# Altium PCB TamagotchiMainBoard.PcbDoc
Units mil, origin at the board's own origin, x right, y up, seen from the top; angles counter-clockwise.
Board outline 2729.06 x 2729.06 mil, 2 copper layers (Top Layer, Bottom Layer); 41 components, 29 nets, 237 pads, 26 vias.
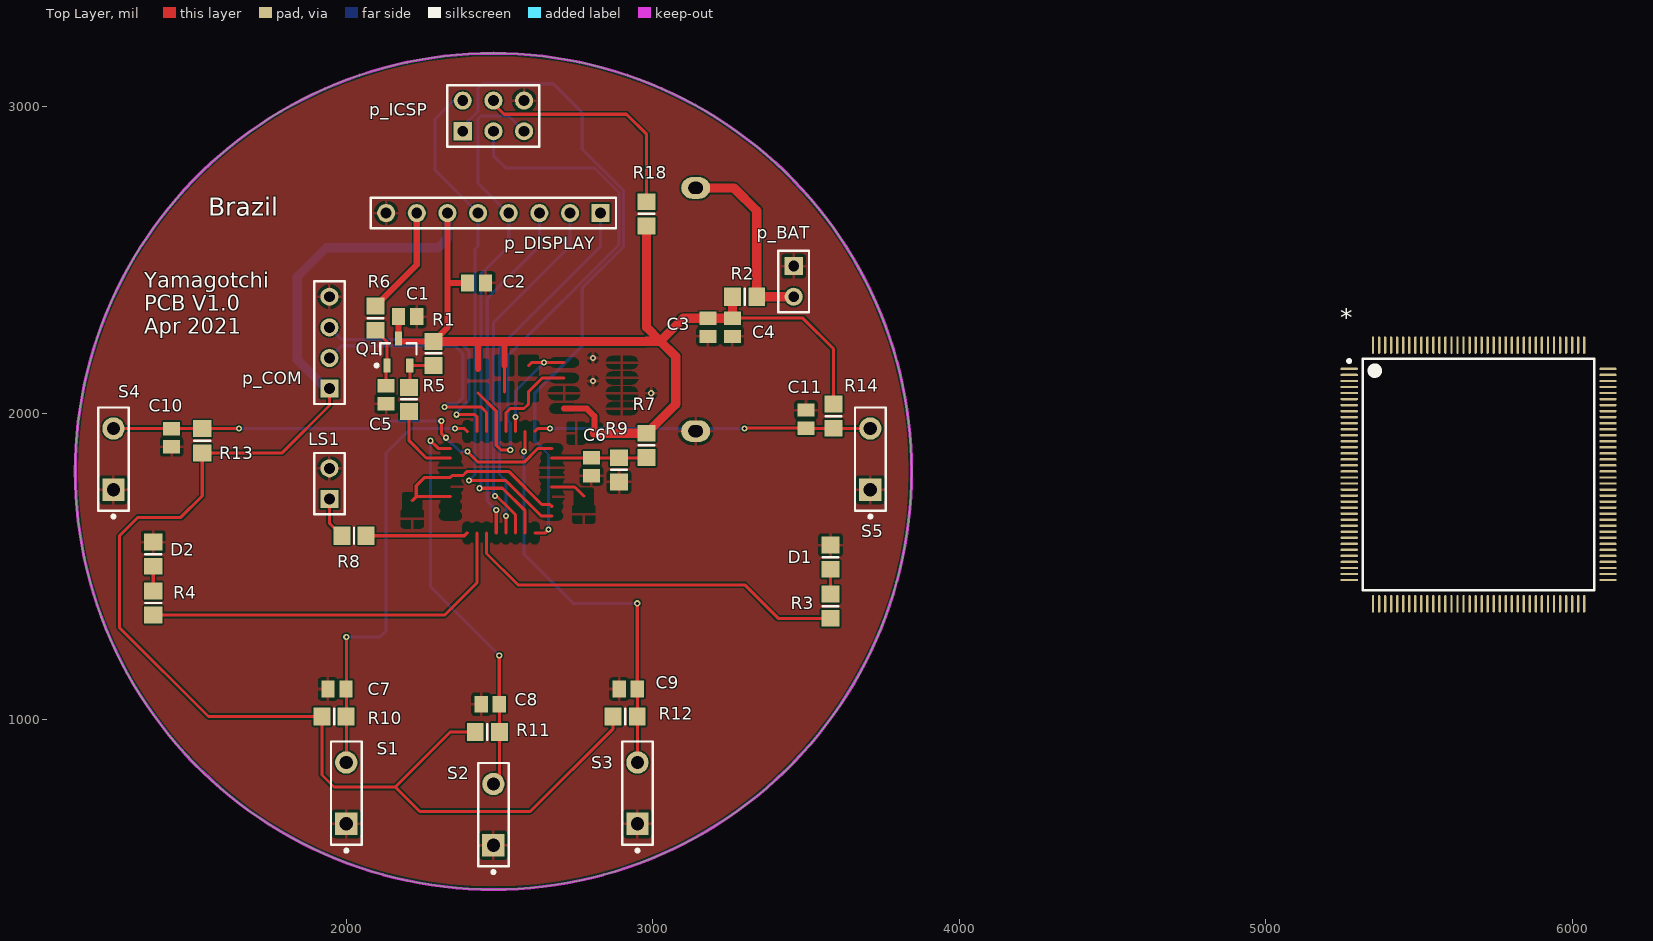
[diagram p0: Top Layer view]
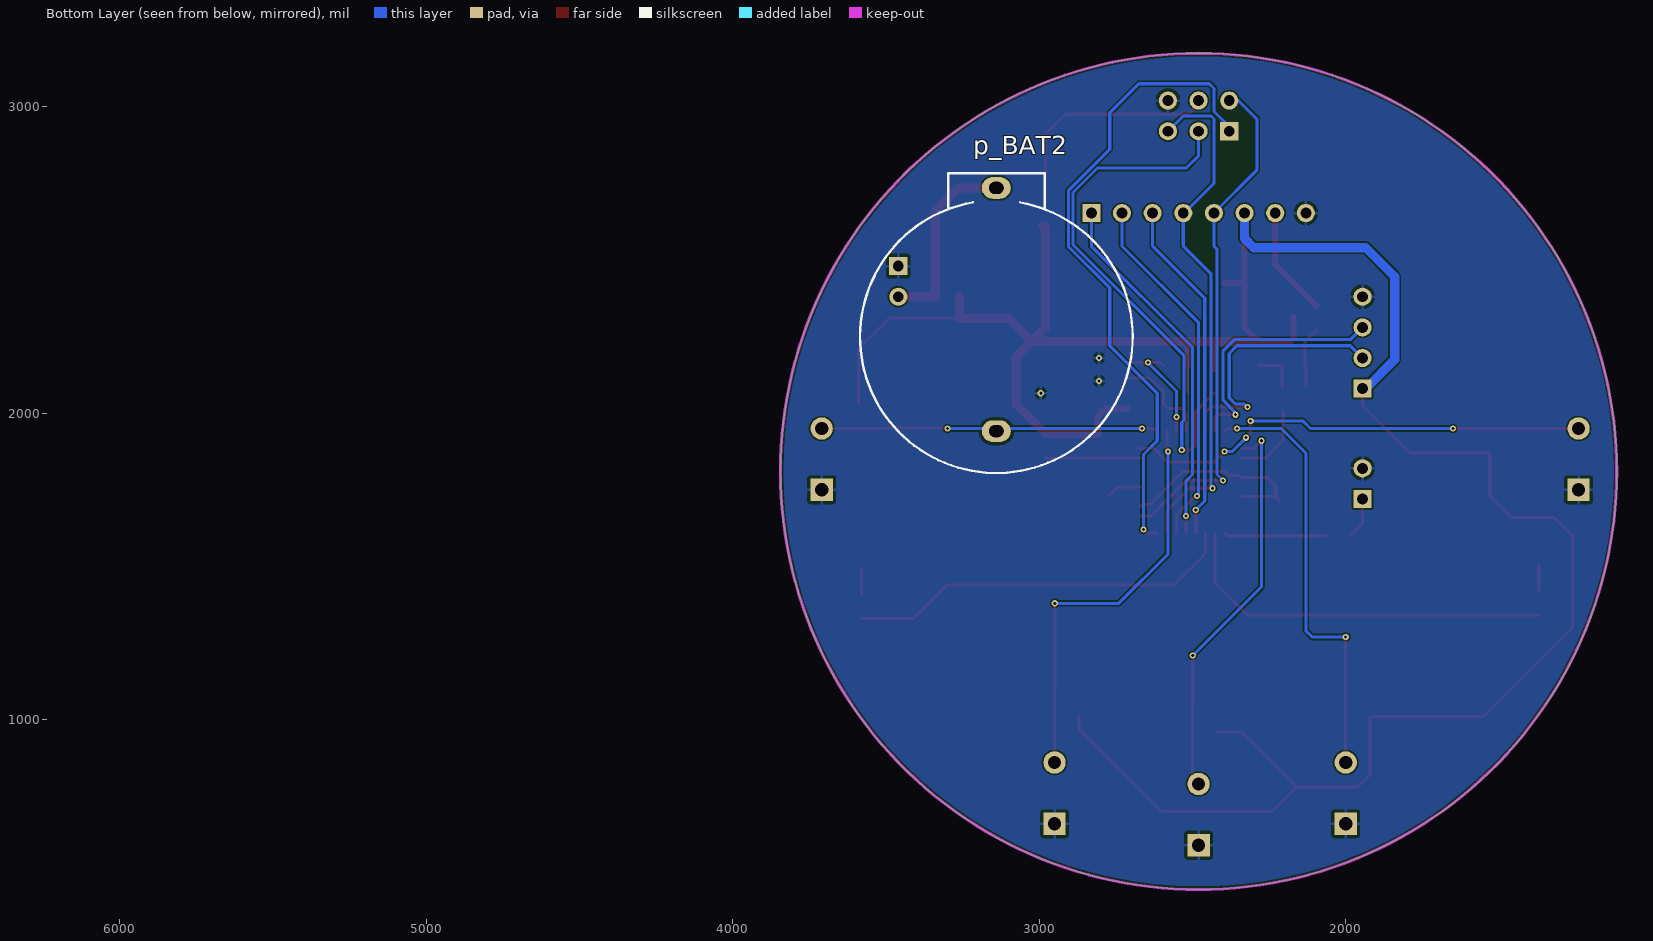
[diagram p1: Bottom Layer view, seen from below]

## Layer stack, top to bottom
Top Solder: solder mask 0.4, Solder Resist, Dk 3.5
Top Layer: signal copper 1.4
Dielectric 1: dielectric 12.6, FR-4, Dk 4.8
Bottom Layer: signal copper 1.4
Bottom Solder: solder mask 0.4, Solder Resist, Dk 3.5

## Board outline
1115.47,1810 ccw(c2480,1810) 2480,445.47 ccw(c2480,1810) 3844.53,1810 ccw(c2480,1810) 2480,3174.53 ccw(c2480,1810)

## Design rules (kind name [scope] priority, off if disabled: settings)
Clearance [All] p1: gap=5 ignorepadtopadclearanceinfootprint=FALSE except(0: Arc-Hole Track-Hole SMDPad-Hole THPad-Hole Via-Hole Fill-Hole Poly-Hole Region-Hole Text-Hole)
PolygonConnect [All] p1: connectstyle=Relief reliefconductorwidth=10 reliefentries=4 polygonreliefangle="90 Angle" airgapwidth=10
RoutingVias [All] p1: holewidth=28 width=50 viastyle="Through Hole" minholewidth=28 minwidth=50 maxholewidth=28 maxwidth=50
SolderMaskExpansion [All] p1: expansion=4
Width [All] p1: maxlimit=30 minlimit=10 preferedwidth=10 minimp=50.000000 maximp=50.000000 favimp=50.000000
30 further rules are at their usual default settings.

## Components (designator, comment, footprint, x,y, rotation, side; value= is the part's Value field where it differs from the comment)
* "R7F0E015D2CFB#AA1" SQFP50P2200X2200X170-144N 5695,1800 r0 top
C1 "Cap" C0805 2200,2315 r180 top value=1nF
C2 "Cap" C0805 2425,2425 r180 top value=10nF
C3 "Cap" C0805 3180,2280 r90 top value=1nF
C4 "Cap" C0805 3260,2280 r90 top value=100nF
C5 "Cap" C0805 2130,2060 r90 top value=1nF
C6 "Cap" C0805 2800,1825 r270 top value=0.1nF
C7 "Cap" C0805 1969.53,1100 r180 top value=0.1nF
C8 "Cap" C0805 2469.53,1050 r180 top value=0.1nF
C9 "Cap" C0805 2920,1100 r180 top value=0.1nF
C10 "Cap" C0805 1430,1920 r270 top value=0.1nF
C11 "Cap" C0805 3500,1980.47 r90 top value=0.1nF
D1 "LED0" 6-0805_M 3580,1530 r90 top
D2 "LED0" 6-0805_M 1370,1540 r90 top
LS1 "Buzzer" HDR1X2 1945,1720 r90 top
p_BAT "Header 2" HDR1X2 3460,2480 r270 top
p_BAT2 "" BTH2032 3140,2247.6 r270 bottom
p_COM "Header 4" HDR1X4 1945,2080 r90 top
p_DISPLAY "Nokia 5110 Display" HDR1X8 2830,2653 r180 top
p_ICSP "FTDI" HDR2X3 2380,2920 r0 top
Q1 "PNP" SOT-23B_N 2170,2200 r90 top
R1 "Res1" 6-0805_M 2285,2195 r270 top value=100k
R2 "Res1" 6-0805_M 3300,2380 r0 top value=0.1R
R3 "Res1" 6-0805_M 3580,1370 r90 top value=10k
R4 "Res1" 6-0805_M 1370,1380.63 r90 top value=10k
R5 "Res1" 6-0805_M 2205,2045 r270 top value=10k
R6 "Res1" 6-0805_M 2095,2310 r270 top value=300R
R7 "Res1" 6-0805_M 2980,1895 r90 top value=120k
R8 "Res1" 6-0805_M 2025,1600 r180 top value=10R
R9 "Res1" 6-0805_M 2890,1815 r270 top value=33k
R10 "Res1" 6-0805_M 1960,1010 r0 top value=100k
R11 "Res1" 6-0805_M 2460,960 r0 top value=100k
R12 "Res1" 6-0805_M 2910,1010 r0 top value=100k
R13 "Res1" 6-0805_M 1530,1910 r90 top value=100k
R14 "Res1" 6-0805_M 3590,1990 r270 top value=100k
R18 "Res1" 6-0805_M 2980,2650.63 r90 top value=0R
S1 "SW-PB" SPST-2 2000,760 r90 top
S2 "SW-PB" SPST-2 2480,690 r90 top
S3 "SW-PB" SPST-2 2950,760 r90 top
S4 "SW-PB" SPST-2 1240,1850 r90 top
S5 "SW-PB" SPST-2 3710,1850 r90 top

## Footprints (in the part's own frame and the unit in brackets; to place one, negate y for a bottom-side part, rotate by r counter-clockwise, add the part's x,y. Pads: shape width x height; smd on the part's side, far side on the other; paste and mask are expansions set on the pad)
6-0805_M [mm] "Chip Resistor, Body 2.0x1.2mm, IPC Low Density"
  rect 1.4x1.5 smd: 1(-1,0) 2(1,0)
  silkscreen extent 0,-0.65 0,0.65, body extent -1.07,-0.7 1.07,0.7, height 0.7
BTH2032 [mm] "CR2032 BATTERY HOLDER"
  oval 1.8x2.4 hole 1 slot 1.2 at 90 deg: 1(-12.38,0) 2(7.78,0)
  silkscreen extent -13.6,-11.3 11.25,11.3, body extent -13.45,-11 11.05,11, height 8.5
C0805 [mm] "Chip Capacitor, Body 2.0x1.3mm, IPC High Density"
  rect 1.1x1.4 smd: 1(-0.75,0) 2(0.75,0)
  body extent -1.1,-0.72 1.1,0.72, height 1.4
HDR1X2 [mm] "Connector; Header; 2 Position"
  rect 1.5x1.5 hole 0.9: 1(0,0)
  round 1.5 hole 0.9: 2(2.54,0)
  silkscreen extent -1.27,-1.27 3.81,1.27
HDR1X4 [mm] "Connector; Header; 4 Position"
  rect 1.5x1.5 hole 0.9: 1(0,0)
  round 1.5 hole 0.9: 2(2.54,0) 3(5.08,0) 4(7.62,0)
  silkscreen extent -1.27,-1.27 8.89,1.27
HDR1X8 [mm] "Connector; Header; 8 Position"
  rect 1.5x1.5 hole 0.9: 1(0,0)
  round 1.5 hole 0.9: 2(2.54,0) 3(5.08,0) 4(7.62,0) 5(10.16,0) 6(12.7,0) 7(15.24,0) 8(17.78,0)
  silkscreen extent -1.27,-1.27 19.05,1.27
HDR2X3 [mm] "Connector; Header; 3x2 Position"
  rect 1.5x1.5 hole 0.9: 1(0,0)
  round 1.5 hole 0.9: 2(0,2.54) 3(2.54,0) 4(2.54,2.54) 5(5.08,0) 6(5.08,2.54)
  silkscreen extent -1.27,-1.27 6.35,3.81
SOT-23B_N [mm] "SOT23, 3-Leads, Body 2.9x1.3mm, Pitch 0.95mm, Lead Span 2.4mm, IPC Medium Density"
  rect 1.15x0.6 smd: 1(-1.125,0.95) 2(-1.125,-0.95) 3(1.125,0)
  silkscreen extent -1.25,-1.5 0.7,1.92, body extent -0.7,-1.5 0.7,1.5, height 1.14
SPST-2 [mm] "Switch; 2 Leads"
  rect 1.85x1.85 hole 1.1: 1(-2.54,0)
  round 1.85 hole 1.1: 2(2.54,0)
  silkscreen extent -4.89,-1.27 4.28,1.27
SQFP50P2200X2200X170-144N [mm] "SQFP, 144-Leads, Body 20.00x20.00mm, Pitch 0.50mm, IPC Medium Density"
  oval 1.45x0.2 smd: 1(-10.725,8.75) 2(-10.725,8.25) 3(-10.725,7.75) 4(-10.725,7.25) 5(-10.725,6.75) 6(-10.725,6.25) 7(-10.725,5.75) 8(-10.725,5.25) 9(-10.725,4.75) 10(-10.725,4.25) 11(-10.725,3.75) 12(-10.725,3.25) 13(-10.725,2.75) 14(-10.725,2.25) 15(-10.725,1.75) 16(-10.725,1.25) 17(-10.725,0.75) 18(-10.725,0.25) 19(-10.725,-0.25) 20(-10.725,-0.75) 21(-10.725,-1.25) 22(-10.725,-1.75) 23(-10.725,-2.25) 24(-10.725,-2.75) 25(-10.725,-3.25) 26(-10.725,-3.75) 27(-10.725,-4.25) 28(-10.725,-4.75) 29(-10.725,-5.25) 30(-10.725,-5.75) 31(-10.725,-6.25) 32(-10.725,-6.75) 33(-10.725,-7.25) 34(-10.725,-7.75) 35(-10.725,-8.25) 36(-10.725,-8.75) 73(10.725,-8.75) 74(10.725,-8.25) 75(10.725,-7.75) 76(10.725,-7.25) 77(10.725,-6.75) 78(10.725,-6.25) 79(10.725,-5.75) 80(10.725,-5.25) 81(10.725,-4.75) 82(10.725,-4.25) 83(10.725,-3.75) 84(10.725,-3.25) 85(10.725,-2.75) 86(10.725,-2.25) 87(10.725,-1.75) 88(10.725,-1.25) 89(10.725,-0.75) 90(10.725,-0.25) 91(10.725,0.25) 92(10.725,0.75) 93(10.725,1.25) 94(10.725,1.75) 95(10.725,2.25) 96(10.725,2.75) 97(10.725,3.25) 98(10.725,3.75) 99(10.725,4.25) 100(10.725,4.75) 101(10.725,5.25) 102(10.725,5.75) 103(10.725,6.25) 104(10.725,6.75) 105(10.725,7.25) 106(10.725,7.75) 107(10.725,8.25) 108(10.725,8.75)
  oval 0.2x1.45 smd: 37(-8.75,-10.725) 38(-8.25,-10.725) 39(-7.75,-10.725) 40(-7.25,-10.725) 41(-6.75,-10.725) 42(-6.25,-10.725) 43(-5.75,-10.725) 44(-5.25,-10.725) 45(-4.75,-10.725) 46(-4.25,-10.725) 47(-3.75,-10.725) 48(-3.25,-10.725) 49(-2.75,-10.725) 50(-2.25,-10.725) 51(-1.75,-10.725) 52(-1.25,-10.725) 53(-0.75,-10.725) 54(-0.25,-10.725) 55(0.25,-10.725) 56(0.75,-10.725) 57(1.25,-10.725) 58(1.75,-10.725) 59(2.25,-10.725) 60(2.75,-10.725) 61(3.25,-10.725) 62(3.75,-10.725) 63(4.25,-10.725) 64(4.75,-10.725) 65(5.25,-10.725) 66(5.75,-10.725) 67(6.25,-10.725) 68(6.75,-10.725) 69(7.25,-10.725) 70(7.75,-10.725) 71(8.25,-10.725) 72(8.75,-10.725) 109(8.75,10.725) 110(8.25,10.725) 111(7.75,10.725) 112(7.25,10.725) 113(6.75,10.725) 114(6.25,10.725) 115(5.75,10.725) 116(5.25,10.725) 117(4.75,10.725) 118(4.25,10.725) 119(3.75,10.725) 120(3.25,10.725) 121(2.75,10.725) 122(2.25,10.725) 123(1.75,10.725) 124(1.25,10.725) 125(0.75,10.725) 126(0.25,10.725) 127(-0.25,10.725) 128(-0.75,10.725) 129(-1.25,10.725) 130(-1.75,10.725) 131(-2.25,10.725) 132(-2.75,10.725) 133(-3.25,10.725) 134(-3.75,10.725) 135(-4.25,10.725) 136(-4.75,10.725) 137(-5.25,10.725) 138(-5.75,10.725) 139(-6.25,10.725) 140(-6.75,10.725) 141(-7.25,10.725) 142(-7.75,10.725) 143(-8.25,10.725) 144(-8.75,10.725)
  silkscreen extent -10.85,-9.6 9.6,9.6, body extent -10,-10 10,10, height 1.7

## Part data
*: "ARM® Cortex®-M0+ series Microcontroller IC 32-Bit 24MHz 1.5MB (1.5M x 8) FLASH 144-LFQFP (20x20)"
C1 C2 C3 C4 C5 C6 C7 C8 C9 C10 C11: "Capacitor", LatestRevisionDate=17-Jul-2002, LatestRevisionNote="Re-released for DXP Platform.", PackageDescription="Radial Cap, Thru-Hole; 2 Leads; 0.3 in Pin Spacing", PackageReference=RAD-0.3, Published=8-Jun-2000, Publisher="Altium Limited"
D1 D2: "Typical INFRARED GaAs LED", LatestRevisionDate=08-Jul-2005, LatestRevisionNote="Mech Layer 1 removed.", PackageDescription="LED; 2 Leads", PackageReference=LED-0, Published=8-Jun-2000, Publisher="Altium Limited"
LS1: "Magnetic Transducer Buzzer", ComponentLink1Description="Manufacturer Link", ComponentLink1URL=http://www.megastar.com/linecard/buzzmode/index.php, DatasheetVersion=17-Dec-2003, LatestRevisionDate=17-Dec-2003, LatestRevisionNote="Schematic revised, PCB Footprint replaced.", PackageDescription="Magnetic Transducer Buzzer", PackageReference=ABSM-1574, Published=24-Mar-1999, Publisher="Altium Limited"
p_BAT: "Header, 2-Pin", LatestRevisionDate=17-Jul-2002, LatestRevisionNote="Re-released for DXP Platform.", Publisher="Altium Limited"
p_BAT2: library part BATH_CR2032, "BATTERY HOLDER, CR2032", .=http://www.chila.ir, MANF_P#=-
p_COM: "Header, 4-Pin", LatestRevisionDate=17-Jul-2002, LatestRevisionNote="Re-released for DXP Platform.", Publisher="Altium Limited"
p_DISPLAY: library part "Header 8", "Header, 8-Pin", LatestRevisionDate=17-Jul-2002, LatestRevisionNote="Re-released for DXP Platform.", Publisher="Altium Limited"
p_ICSP: library part "Header 6", "Header, 6-Pin", LatestRevisionDate=17-Jul-2002, LatestRevisionNote="Re-released for DXP Platform.", Publisher="Altium Limited"
Q1: "PNP Bipolar Transistor", LatestRevisionDate=29-May-2009, LatestRevisionNote="IPC-7351 Footprint Added.", PackageDescription="3-Pin SOT-23 Package 0.95 mm Pitch, 2.4 mm Lead Span", PackageReference=SOT-23B, PackageVersion=Aug-1999, Published=8-Jun-2000, Publisher="Altium Limited"
R1 R2 R3 R4 R5 R6 R7 R8 R9 R10 R11 R12 R13 R14 R18: "Resistor", LatestRevisionDate=17-Jul-2002, LatestRevisionNote="Re-released for DXP Platform.", PackageDescription="Axial Device, Thru-Hole; 2 Leads; 0.3 in Pin Spacing", PackageReference=AXIAL-0.3, Published=8-Jun-2000, Publisher="Altium Limited"
S1 S2 S3 S4 S5: "Switch", LatestRevisionDate=17-Jul-2002, LatestRevisionNote="Re-released for DXP Platform.", PackageDescription="Switch; 2 Leads", PackageReference=SPST-2, Published=24-Mar-1999, Publisher="Altium Limited"

## Via types
v1: diameter 20, hole 10, Top Layer to Bottom Layer, 26 vias

## Nets (pads, with @x,y where several pads share a name; then routed paths per layer and width w, separated by ;. In a path a pad name is that pad's centre, name@x,y a point inside that pad or via, vN(x,y) a via of type N, cw(c..) or ccw(c..) an arc to the next point about the centre after c; other vN are vias at no path point)
A: C8.1 R11.2 S2.2 | length 1295.9
  Top Layer w10: v1(2275,1910) 2299.76,1885.24 2339.65,1885.24 ; S2.2 2499.37,809.37 R11.2 2499.37,1049.68 C8.1 v1(2499.06,1209.06)
  Bottom Layer w10: v1(2275,1910) 2275,1433.11 v1(2499.06,1209.06)
B: C9.1 R12.2 S3.2 | length 1358.3
  Top Layer w10: v1(2580,1875) 2583.74,1878.74 2583.74,1940.35 ; S3.2 2950,1099.53 C9.1 v1(2949.53,1379.53) v1@2950,1380
  Bottom Layer w10: v1(2580,1875) 2580,1540 2740.47,1379.53 v1(2949.53,1379.53)
BL_POWER: p_DISPLAY.7 R6.1 | length 359.5
  Top Layer w20: R6.1 2230,2484.37 p_DISPLAY.7
C: C10.1 R13.2 S4.2 | length 1539.5
  Top Layer w10: S4.2 1529.37,1950 R13.2 1649.37,1949.37 v1(1650,1950) ; v1(2310,1975) 2310,1935 v1(2325,1920) ; v1(2395,1875) 2430,1840 2580.36,1840 2625.24,1884.88 2625.24,1885.24 2670.35,1885.24
  Bottom Layer w10: v1(1650,1950) 2115,1950 2140,1975 v1(2310,1975) ; v1(2325,1920) 2370,1875 v1(2395,1875)
D: C11.1 R14.2 S5.2 | length 1099.5
  Top Layer w10: 2615.24,1940.35 2624.88,1950 v1(2665,1950) ; v1(3300,1950) 3300.94,1950.94 C11.1 3500.94,1950 S5.2
  Bottom Layer w10: v1(2665,1950) v1(3300,1950)
ENTER: C7.1 R10.2 S1.2 | length 1431
  Top Layer w10: S1.2 2000,1099.06 C7.1 2000,1100.94 v1(2000,1270) ; v1(2355,1950) 2385.12,1950 2394.76,1940.35
  Bottom Layer w10: v1(2000,1270) 2110,1270 2130,1290 2130,1870 2210,1950 v1(2355,1950)
GND: C1.1 C2.1 C3.1 C4.1 C5.1 C6.2 C7.2 C8.2 C9.2 C10.2 C11.2 D1.2 D2.2 LS1.2 p_BAT2.2 p_BAT.1 p_COM.4 p_DISPLAY.8 p_ICSP.6 R9.2 S1.1 S2.1 S3.1 S4.1 S5.1
  other v1: 2995,2065 2805,2105 2805,2180
LCD_BL: R5.2 | length 253.6
  Top Layer w10: R5.2 2205,1910 2261.26,1853.74 2339.65,1853.74
LCD_CE: p_DISPLAY.2 | length 1180
  Top Layer w10: v1(2485,1730) 2490,1730 2530.75,1689.25 2531.1,1689.25 2552.24,1668.11 2552.24,1609.65
  Bottom Layer w10: v1(2485,1730) 2480,1735 2480,2295 2730,2545 p_DISPLAY.2
LCD_CLK: p_DISPLAY.5 p_ICSP.2 | length 1683.4
  Top Layer w10: v1(2400,1780) 2520,1780 2635.24,1664.76 2670.35,1664.76
  Bottom Layer w10: p_ICSP.2 2350,3020 2290,2960 2290,2793 p_DISPLAY.5 2430,2545 2420,2535 2420,1800 v1(2400,1780)
LCD_DC: p_DISPLAY.3 | length 1125.9
  Top Layer w10: 2489.25,1609.65 v1(2489.25,1684.25)
  Bottom Layer w10: v1(2489.25,1684.25) 2460,1713.5 2460,2375 2630,2545 p_DISPLAY.3
LCD_DIN: p_DISPLAY.4 p_ICSP.5 | length 1713.3
  Top Layer w10: v1(2435,1755) 2510,1755 2583.74,1681.26 2583.74,1609.65
  Bottom Layer w10: v1(2435,1755) 2440,1760 2440,2455 2530,2545 p_DISPLAY.4 2527,2653 2430,2750 2430,2960 2440,2970 2530,2970 p_ICSP.5
LCD_RST: p_DISPLAY.1 | length 1188.6
  Top Layer w10: 2520.75,1609.65 v1(2520.75,1664.25)
  Bottom Layer w10: v1(2520.75,1664.25) 2520.75,1779.25 2500,1800 2500,2215 2830,2545 p_DISPLAY.1
LED0: R3.1 | length 1277.3
  Top Layer w10: 2457.76,1609.65 2457.76,1542.24 2560,1440 3300,1440 3409.37,1330.63 R3.1
LED1: R4.1 | length 1263.1
  Top Layer w10: R4.1 2321.26,1341.26 2426.26,1446.26 2426.26,1609.65
MISO: p_ICSP.1 | length 2150
  Top Layer w10: 2615.24,1609.65 2649.65,1609.65 v1(2660,1620)
  Bottom Layer w10: p_ICSP.1 2380,2935 2429.72,2984.72 2429.72,3059.72 2445,3075 2675,3075 2770,2980 2770,2861.21 2905,2726.21 2905,2543.79 2770,2408.79 2770,2220 2615,2065 2615,1910 2660,1865 v1(2660,1620)
NetC5_2: C5.2 Q1.1 R6.2 | length 197.8
  Top Layer w10: R6.2 2132.6,2233.03 Q1.1 2130,2153.11 C5.2
NetD1_1: D1.1 R3.2 | length 81.3
  Top Layer w10: R3.2 D1.1
NetD2_1: D2.1 R4.2 | length 80.6
  Top Layer w10: R4.2 D2.1
NetLS1_1: LS1.1 R8.2 | length 136.8
  Top Layer w10: LS1.1 1945,1640.63 R8.2
Netp_BAT2_1: p_BAT2.1 p_BAT.2 R2.2 | length 631.4
  Top Layer w30: p_BAT2.1 3265,2735 3339.37,2660.63 R2.2 p_BAT.2
Netp_ICSP_4: p_ICSP.4 R18.2 | length 771.4
  Top Layer w10: p_ICSP.4 2480,3010 2514.53,2975.47 2914.53,2975.47 2980,2910 R18.2
NetQ1_2: Q1.2 R1.2 R5.1 | length 150
  Top Layer w10: R5.1 2207.4,2086.77 Q1.2 2207.48,2155.63 R1.2
RESET: p_ICSP.3 | length 1779.9
  Top Layer w10: 2430,2065.63 2489.25,2006.38 2489.25,1895.75 2505,1880 v1(2535,1880)
  Bottom Layer w10: p_ICSP.3 2480,2840 2520,2800 2810,2800 2890,2720 2890,2550 2527.24,2187.24 2527.24,1977.4 2535,1969.64 v1(2535,1880)
RX: p_COM.3 | length 828.9
  Top Layer w10: v1(2360,1995) 2420,1995 2426.26,1988.74 2426.26,1940.35
  Bottom Layer w10: p_COM.3 1985,2240 2363.28,2240 2400,2203.28 2400,2041.72 2360,2001.72 v1(2360,1995)
SOUND: R8.1 | length 334.4
  Top Layer w10: R8.1 2385.12,1600 2394.76,1609.65
TX: p_COM.2 | length 886.4
  Top Layer w10: v1(2320,2020) 2440,2020 2457.76,2002.24 2457.76,1940.35
  Bottom Layer w10: p_COM.2 1985,2220 2355,2220 2380,2195 2380,2050 2360,2030 2330,2030 v1(2320,2020)
VBAT: C6.1 R7.1 R9.1 | length 310.4
  Top Layer w10: 2670.35,1853.74 2978.11,1853.74 R7.1
VCC: C1.2 C2.2 C3.2 C4.2 p_COM.1 p_DISPLAY.6 Q1.3 R1.1 R2.1 R7.2 R10.1 R11.1 R12.1 R13.1 R14.1 R18.1 | length 8472.6
  Top Layer w10: p_COM.1 1945,2025 1790.63,1870.63 R13.1 1530,1730 1460,1660 1320,1660 1260,1600 1260,1300 1550,1010 R10.1 1920.63,819.37 1960,780 2160,780 ; Q1.3@2170.47,2244.76 Q1.3 Q1.3@2179.92,2234.37 ; R11.1 2340,960 2160,780 ; 2515,2234.37 2515.63,2233.74 ; 2515.63,2070 2515.63,2155 ; R12.1 2870.63,970.63 2600,700 2240,700 2160,780 ; C4.2@3260.63,2310.16 3489.84,2310.16 3590,2210 R14.1
  Top Layer w20: Q1.3@2170.47,2244.76 C1.2 ; Q1.3@2179.92,2234.37 R1.1 2330,2279.37 2330,2420 ; p_DISPLAY.6 2330,2420 ; C2.2 2335,2425 2330,2420 ; 2430,2144.37 2430,2234.37 ; 2515.63,2155 2515.63,2233.74 ; 2710.51,2015 2785,2015 2809.53,1990.47 2809.53,1935
  Top Layer w30: R1.1 2430,2234.37 2515,2234.37 2979.37,2234.37 2980,2235 3025,2235 ; 2809.53,1935 2810.16,1934.37 R7.2 3075,2029.37 3075,2185 3025,2235 ; R18.1@2988.74,2611.26 R18.1 2980,2280 3025,2235 ; R2.1 3260.63,2310.16 C4.2 C3.2 3099.53,2309.53 3025,2235
  Bottom Layer w30: p_COM.1 1935,2080 1840,2175 1840,2445 1935,2540 2300,2540 2330,2570 p_DISPLAY.6
pads on no net: *.1 *.2 *.3 *.4 *.5 *.6 *.7 *.8 *.9 *.10 *.11 *.12 *.13 *.14 *.15 *.16 *.17 *.18 *.19 *.20 *.21 *.22 *.23 *.24 *.25 *.26 *.27 *.28 *.29 *.30 *.31 *.32 *.33 *.34 *.35 *.36 *.37 *.38 *.39 *.40 *.41 *.42 *.43 *.44 *.45 *.46 *.47 *.48 *.49 *.50 *.51 *.52 *.53 *.54 *.55 *.56 *.57 *.58 *.59 *.60 *.61 *.62 *.63 *.64 *.65 *.66 *.67 *.68 *.69 *.70 *.71 *.72 *.73 *.74 *.75 *.76 *.77 *.78 *.79 *.80 *.81 *.82 *.83 *.84 *.85 *.86 *.87 *.88 *.89 *.90 *.91 *.92 *.93 *.94 *.95 *.96 *.97 *.98 *.99 *.100 *.101 *.102 *.103 *.104 *.105 *.106 *.107 *.108 *.109 *.110 *.111 *.112 *.113 *.114 *.115 *.116 *.117 *.118 *.119 *.120 *.121 *.122 *.123 *.124 *.125 *.126 *.127 *.128 *.129 *.130 *.131 *.132 *.133 *.134 *.135 *.136 *.137 *.138 *.139 *.140 *.141 *.142 *.143 *.144
copper on no net: | length 1495.8
  Top Layer w10: 2215,1714.53 2228.23,1727.76 ; 2339.65,1727.76 2228.23,1727.76 ; 2520.75,1940.35 2520.75,2000.75 2535,2015 2580,2015 2594.37,2029.37 2594.37,2070 2639.37,2115 2710.51,2115 ; 2552.24,1940.35 v1(2552.24,1987.76) ; 2594.37,2155 2604.37,2165 v1(2645,2165) 2710.51,2165 ; 2670.35,1696.26 2664.68,1701.93 2638,1701.93 2529.93,1810 2394.64,1810 2381.06,1796.42 2345.32,1796.42 2339.65,1790.75 2255.75,1790.75 2228.23,1763.23 2228.23,1727.76 ; 2670.35,1759.25 2745.28,1759.25 2775,1729.53
  Bottom Layer w10: v1(2552.24,1987.76) 2552.24,2072.24 v1(2645,2165)

## Polygon pours and split planes (outlines as drawn)
GND on Bottom Layer "Top Layer-No Net" (solid, remove dead copper, pour order 2): 600,3640 4320,3640 4580,3380 4540,3340 4540,160 460,160 440,140
GND on Top Layer "Top Layer-No Net" (solid, remove dead copper, pour order 0): 780,3340 4140,3340 4140,180 4120,160 780,160

## Keep-outs
Top Layer:
  circle w10: c2480,1810 r1364.53
Bottom Layer:
  circle w10: c2480,1810 r1364.53

## Silkscreen, mask and mechanical layers (free items; w line width, h text height)
Top Overlay:
  text "Brazil" at 1550,2645 h60
  text "Yamagotchi / PCB V1.0 / Apr 2021" at 1340,2260 h50
Mechanical 1:
  circle w10: c2480,1810 r1364.53